# EAGLE board ISP Goblin (EAGLE 6.3)
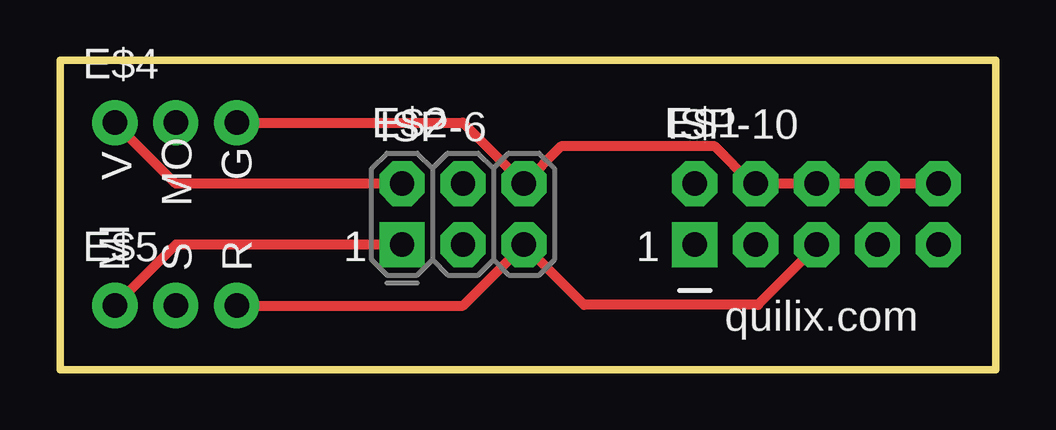
[diagram p0: board, top side]
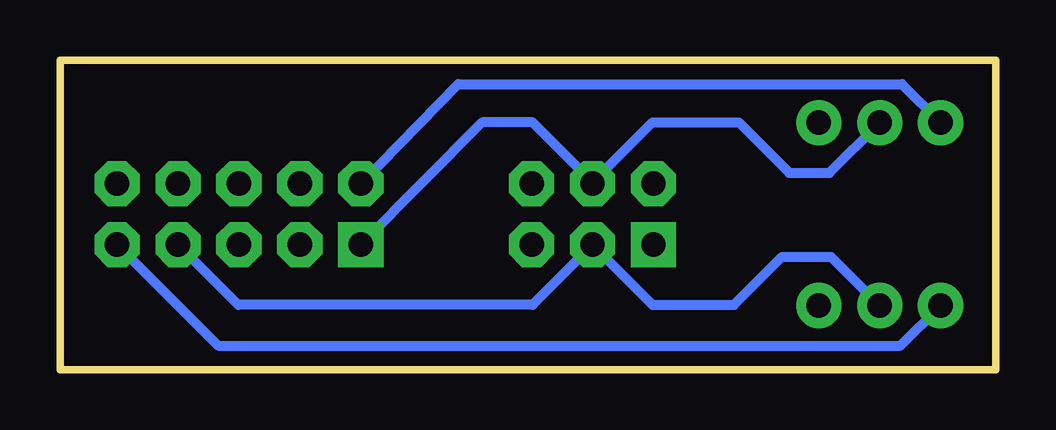
[diagram p1: board, bottom side, seen from below]

Size 39 x 12.9 mm. Coordinates in mm from the lower left corner, seen from the top.
Outline: 0,0 39,0 39,12.9 0,12.9 0,0
Copper layers (1*16): Top 0.035mm / dielectric 1.5mm / Bottom 0.035mm
Design rules "default": minimum track width 10mil, minimum drill 24mil, track to track 8mil, track to pad 8mil, pad to pad 8mil, via to via 8mil, smd to smd 8mil, copper to edge 40mil, drill to drill 8mil, minimum pad ring 10mil, minimum via ring 8mil, stop-mask expansion 4mil, vias tented up to drill 0mil, thermal gap 10mil

## Footprints (pad centres in the part's own frame; a part is rotated, then mirrored left to right if it is on the bottom)
2X5-NS = drill 1.016 pad 1.88 square: 1 -1.27,5.08 | drill 1.016 pad 1.88 octagon: 2 1.27,5.08; 3 -1.27,2.54; 4 1.27,2.54; 5 -1.27,0; 6 1.27,0; 7 -1.27,-2.54; 8 1.27,-2.54; 9 -1.27,-5.08; 10 1.27,-5.08
2X3-NS = drill 1.016 pad 1.88 square: 1 -2.54,-1.27 | drill 1.016 pad 1.88 octagon: 2 -2.54,1.27; 3 0,-1.27; 4 0,1.27; 5 2.54,-1.27; 6 2.54,1.27
1X03_NO_SILK = drill 1.016 pad 1.88: 1 0,0; 2 2.54,0; 3 5.08,0

## Placement (x,y rotation side)
E$1  [2X5-NS]  31.54,6.48 90 top
E$2  [2X3-NS]  16.8,6.48 0 top
E$4  [1X03_NO_SILK]  2.29,10.29 0 top
E$5  [1X03_NO_SILK]  2.29,2.67 0 top

## Library data of the parts
E$1 E$2 E$4 E$5 = SparkFun

## Nets
S$1: E$1.1 E$2.4 E$4.2
S$2: E$1.5 E$2.5 E$5.3
S$3: E$1.7 E$2.3 E$5.2
S$4: E$1.9 E$2.1 E$5.1
S$5: E$1.2 E$2.2 E$4.1
S$6: E$1.4 E$1.6 E$1.8 E$1.10 E$2.6 E$4.3

## Tracks (layer width: path | path; a pad name or v marks a point on that pad's centre or on a via)
S$1
  Bottom 0.406: 16.8,7.8 14.3,10.3 10.7,10.3 8.6,8.2 6.92,8.2 E$4.2 | E$2.4 16.8,7.8 | 16.8,7.8 19.3,10.3 21.4,10.3 26.4,5.27 E$1.1
S$2
  Top 0.406: E$5.3 16.8,2.67 E$2.5 21.85,2.7 29.1,2.7 31.54,5.14 E$1.5
S$3
  Bottom 0.406: E$2.3 14.3,2.7 10.9,2.7 8.9,4.7 6.86,4.7 E$5.2 | E$2.3 | E$2.3 19.3,2.7 31.57,2.7 E$1.7
S$4
  Top 0.406: E$2.1 4.83,5.21 E$5.1
  Bottom 0.406: E$1.9 32.4,1 3.96,1 E$5.1
S$5
  Top 0.406: E$2.2 4.83,7.75 E$4.1
  Bottom 0.406: E$1.2 22.4,11.9 3.9,11.9 E$4.1
S$6
  Top 0.406: E$1.10 E$1.8 E$1.6 E$1.4 28.85,7.75 27.3,9.3 20.89,9.3 E$2.6 16.8,10.29 E$4.3

## Text on the board
_tsilk: ISP-6 | ISP-10 | V | G | MO | MI | S | R | 1 | 1 | quilix.com